# Altium PCB SPI peripherals test.PcbDoc
Units mil, origin at the board's own origin, x right, y up, seen from the top; angles counter-clockwise.
Board outline 6000 x 4000 mil, 2 copper layers (Top Layer, Bottom Layer); 20 components, 24 nets, 92 pads, 18 vias.
Unrouted connection lines stored in the file: 5.
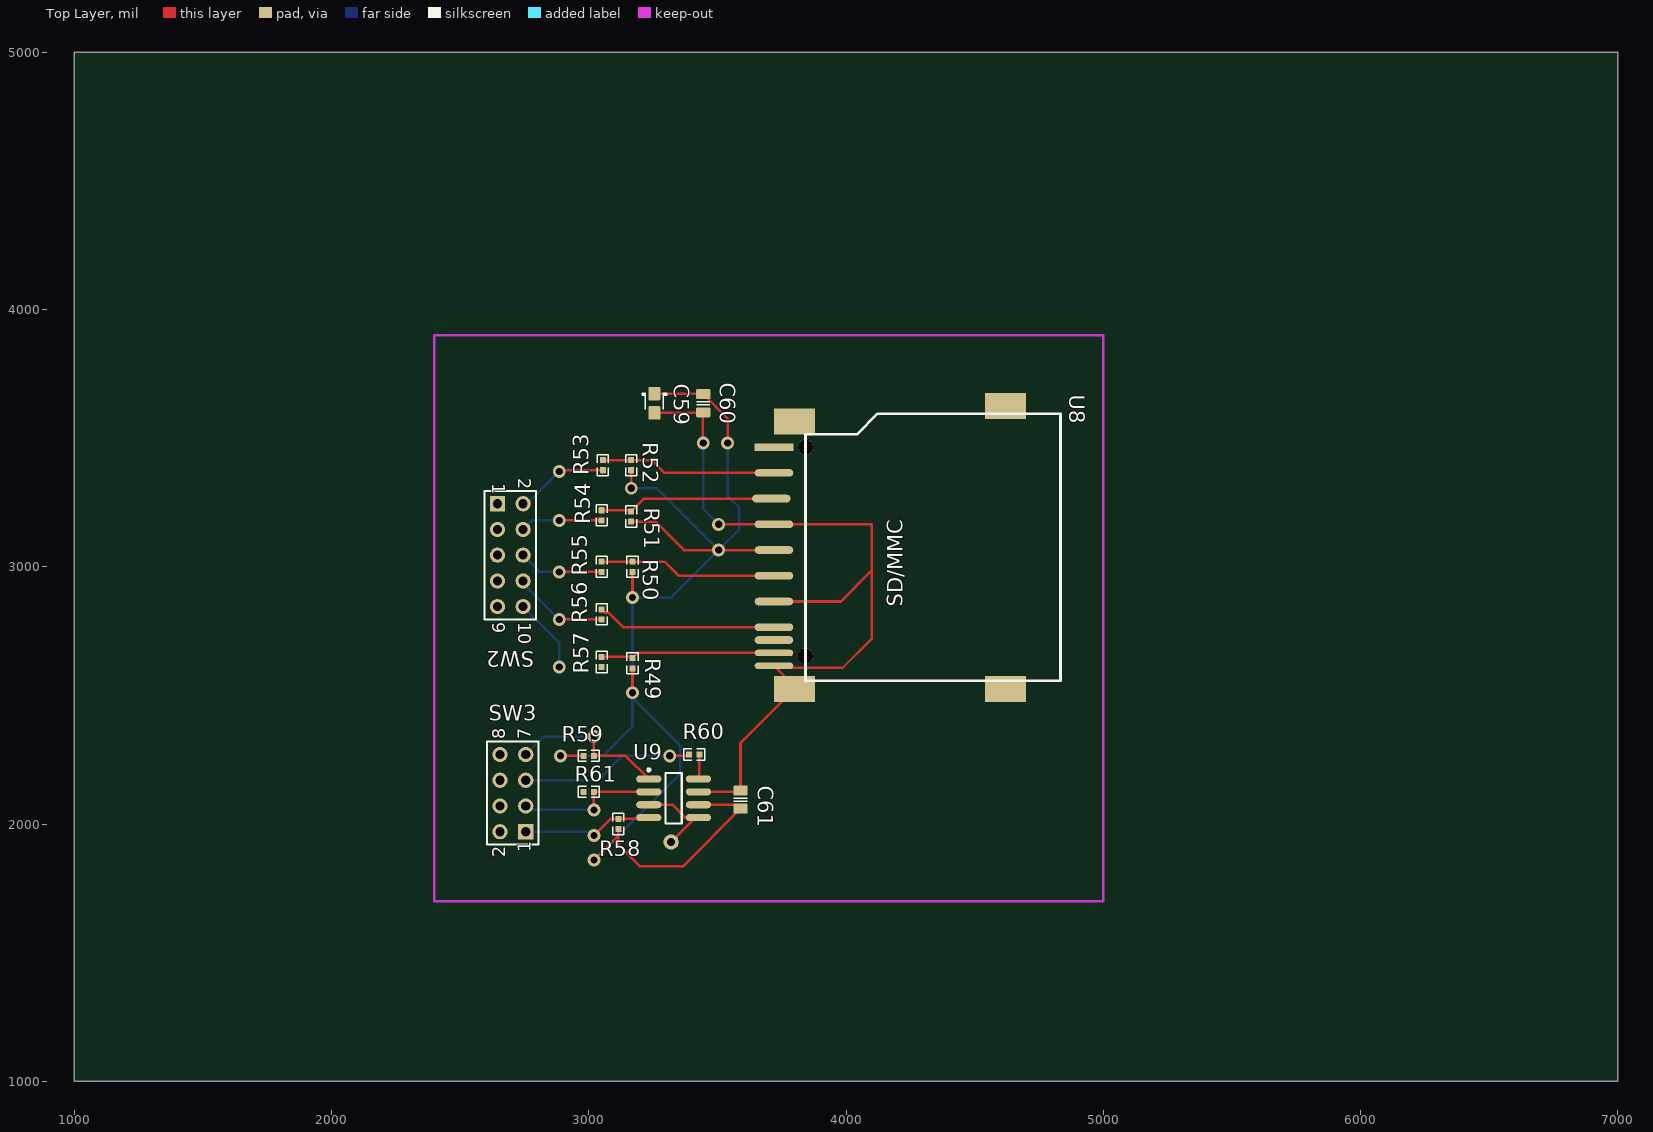
[diagram p0: Top Layer view]
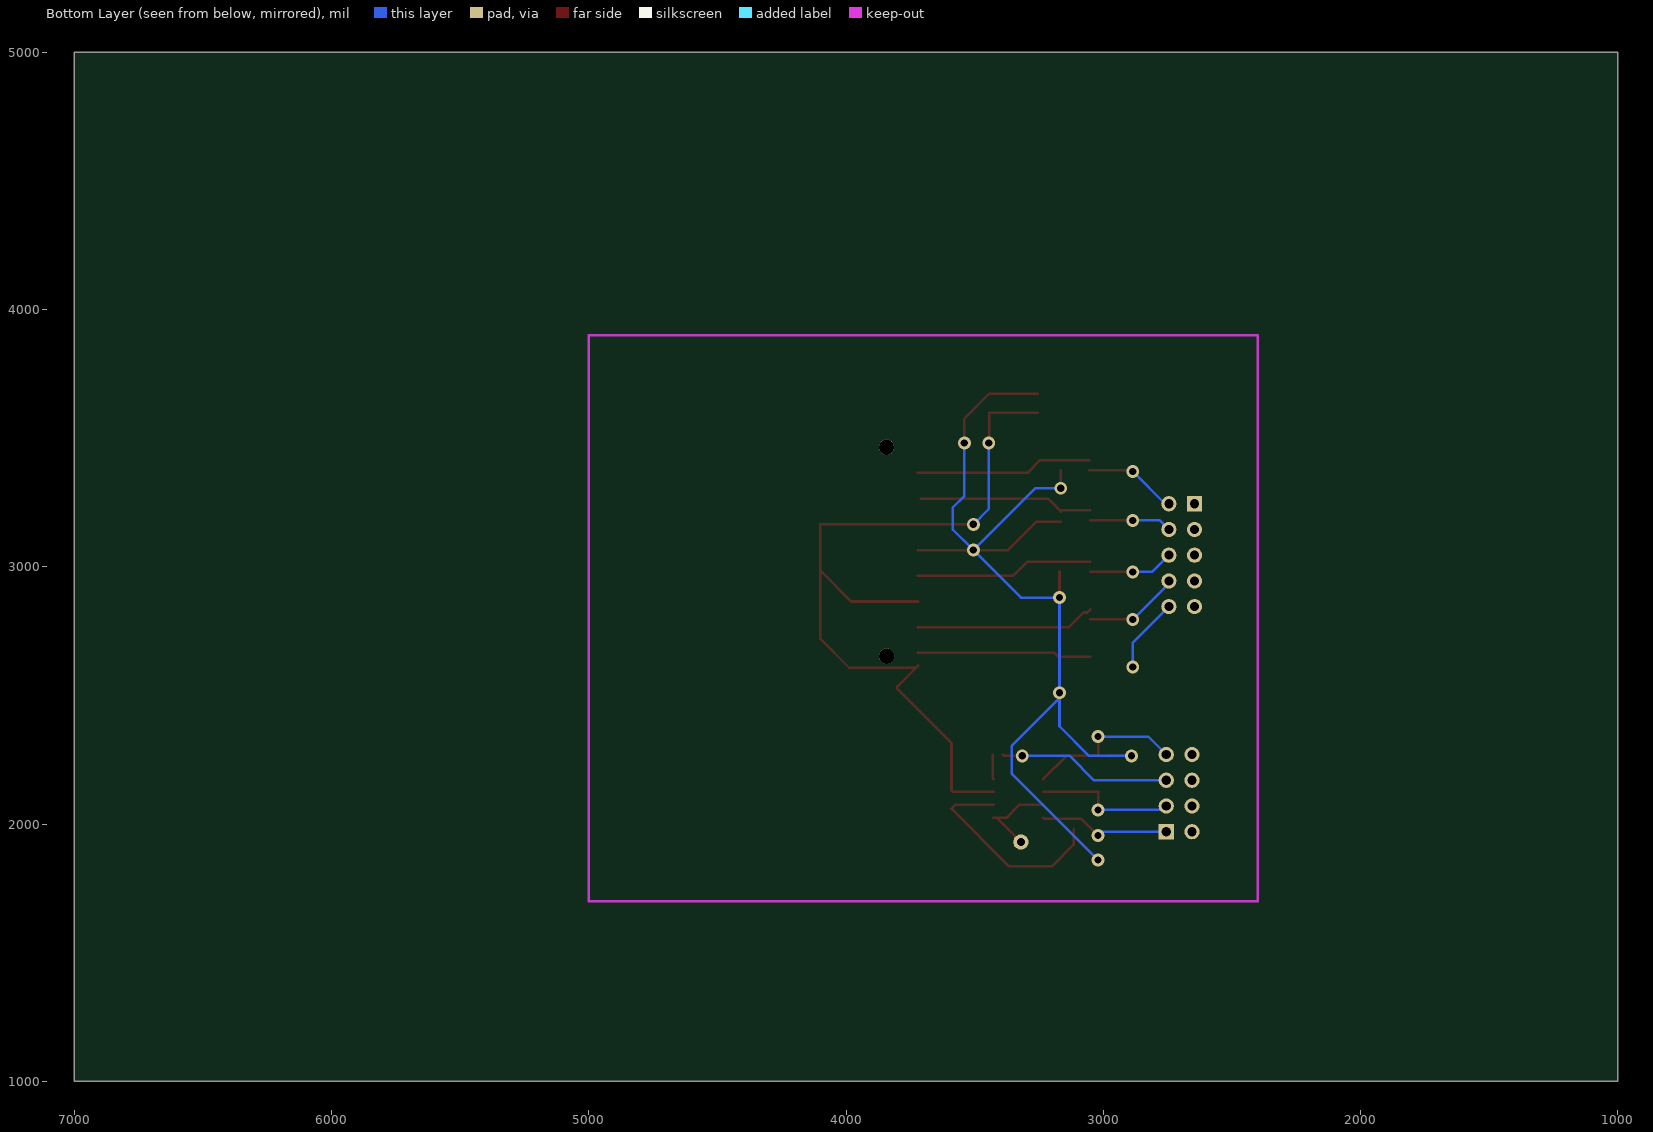
[diagram p1: Bottom Layer view, seen from below]
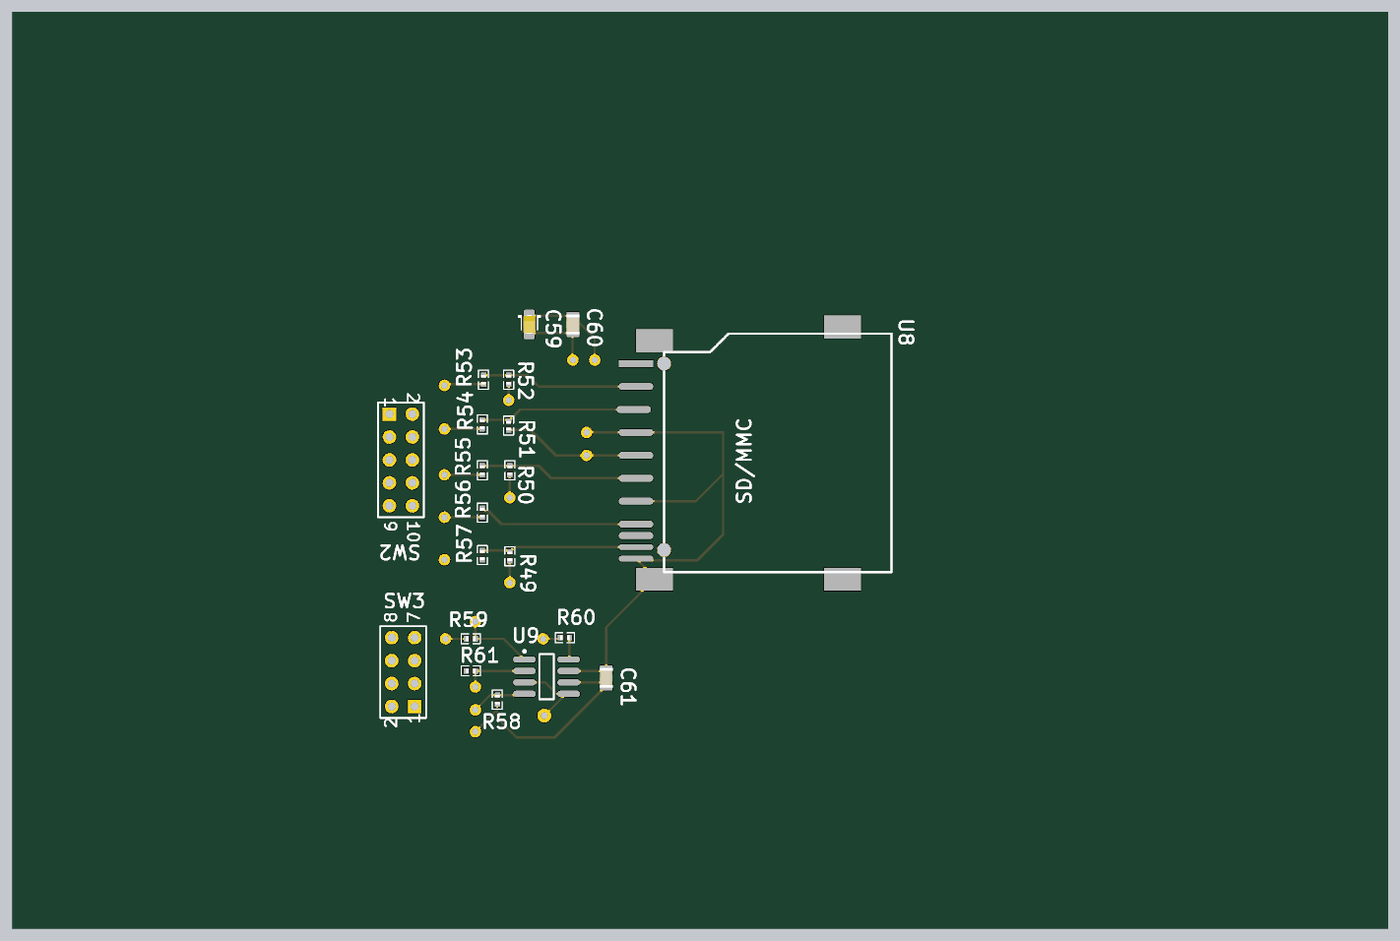
[diagram p2: 3D render of the assembled board from above, using the file's embedded part models]

## Layer stack, top to bottom
Top Layer: signal copper 1.4
Dielectric: dielectric 12.6, FR-4, Dk 4.8
Bottom Layer: signal copper 1.4

## Board outline
1000,1000 7000,1000 7000,5000 1000,5000

## Design rules (kind name [scope] priority, off if disabled: settings)
Clearance [All] p1: gap=10
PolygonConnect [All] p1: connectstyle=Relief reliefconductorwidth=10 reliefentries=4 polygonreliefangle="90 Angle"
RoutingVias [All] p1: holewidth=28 width=50 viastyle="Through Hole" minholewidth=28 minwidth=50 maxholewidth=28 maxwidth=50
SilkscreenOverComponentPads [All] p1: minsilkscreentomaskgap=10
SolderMaskExpansion [All] p1: expansion=4
Width [All] p1: maxlimit=10 minlimit=10 preferedwidth=10
27 further rules are at their usual default settings.

## Components (designator, comment, footprint, x,y, rotation, side; value= is the part's Value field where it differs from the comment)
C59 "Value" CAPMP2012X150USR 3255,3635.75 r270 top
C60 "approved sub OK" CAPC2012N 3445,3635.75 r90 top
C61 "approved sub OK" CAPC2012N 3590,2095 r270 top
R49 "Thick Film" RESC1005N 3170,2625 r270 top
R50 "Thick Film" RESC1005N 3170,3000 r270 top
R51 "Thick Film" RESC1005N 3165,3195 r270 top
R52 "Thick Film" RESC1005N 3165,3395 r270 top
R53 "Thick Film" RESC1005N 3055,3395 r270 top
R54 "Thick Film" RESC1005N 3050,3200 r270 top
R55 "Thick Film" RESC1005N 3050,3000 r270 top
R56 "Thick Film" RESC1005N 3050,2815 r270 top
R57 "Thick Film" RESC1005N 3050,2630 r270 top
R58 "Thick Film" RESC1005N 3115,2000 r90 top
R59 "Thick Film" RESC1005N 3000,2265 r0 top
R60 "Thick Film" RESC1005N 3410,2270 r180 top
R61 "Thick Film" RESC1005N 3000,2125 r180 top
SW2 "Header 5X2" HDR2X5 2645,3245 r270 top
SW3 "Header 4X2" HDR2X4 2755,1970 r90 top
U8 "MMC-SD-SDDMF-0095B-KINGFONT" sd1 3720,3365 r270 top
U9 "AT45DB081D-SU" SOIC-SN8_M 3330,2100 r0 top

## Footprints (in the part's own frame and the unit in brackets; to place one, negate y for a bottom-side part, rotate by r counter-clockwise, add the part's x,y. Pads: shape width x height; smd on the part's side, far side on the other; paste and mask are expansions set on the pad)
CAPC2012N [mm] "Chip Capacitor, Body 2.0x1.2mm, 0805, IPC Medium Density"
  round 0.254 on Mech14: 0(0,0)
  rrect25% 1x1.4 smd: 1(-0.9,0) 2(0.9,0)
  Top Layer pour cut-out: -0.4,0.8 0.4,0.8 0.4,-0.8 -0.4,-0.8
  silkscreen extent -0.15,-0.65 0.15,0.65, body extent -1.1,-0.72 1.1,0.73, height 1.34
CAPMP2012X150USR [mm] "Molded body capacitor, Body 2.0x1.2mm, 0805, IPC Medium Density"
  round 0.254 on Mech14: 0(0,0)
  rrect25% 1.35x1.2 smd: 1(-0.95,0) 2(0.95,0)
  Top Layer pour cut-out: -0.4,0.8 0.4,0.8 0.4,-0.8 -0.4,-0.8
  silkscreen extent -1,-1.2 0.6,1.2, body extent -1.02,-0.67 1.03,0.68, height 1.5
HDR2X4 [mm] "Connector; Header; 4x2 Position"
  rect 1.5x1.5 hole 0.9: 1(0,0)
  round 1.5 hole 0.9: 2(0,2.54) 3(2.54,0) 4(2.54,2.54) 5(5.08,0) 6(5.08,2.54) 7(7.62,0) 8(7.62,2.54)
  silkscreen extent -1.27,-1.27 8.89,3.81
HDR2X5 [mm] "Connector; Header; 5x2 Position"
  rect 1.5x1.5 hole 0.9: 1(0,0)
  round 1.5 hole 0.9: 2(0,2.54) 3(2.54,0) 4(2.54,2.54) 5(5.08,0) 6(5.08,2.54) 7(7.62,0) 8(7.62,2.54) 9(10.16,0) 10(10.16,2.54)
  silkscreen extent -1.27,-1.27 11.43,3.81
RESC1005N [mm] "Chip Resistor, Body 1.0x0.5mm, EIA 0402, IPC Medium Density"
  round 0.2 on Mech14: 0(0,0)
  rrect20% 0.6x0.6 smd: 1(-0.5,0) 2(0.5,0)
  Top Layer pour cut-out: -0.2,0.35 0.2,0.35 0.2,-0.35 -0.2,-0.35
  silkscreen extent -1.05,-0.55 1.05,0.55, body extent -0.52,-0.27 0.53,0.28, height 0.4
sd1 [mil]
  oval 30x150 smd: 1(0,0) 2(100,-10) 3(200,0) 4(300,0) 5(400,0) 6(500,0) 7(600,0) 8(650,0)
  rect 30x150 smd: 9(-100,0)
  oval 25x150 smd: 10(700,0) 11(750,0)
  rect 100x160 smd: 12(-200,80) 13(840,80) 15(-260,900) 16(840,900)
  round 60 hole 60: 21(712.6,122.05) 22(-100,122.44)
  silkscreen extent -230,122 809,1114
SOIC-SN8_M [mm] "SOIC, 8-Leads, Body 4.9x3.8mm, Pitch 1.27mm, IPC Low Density"
  oval 2.5x0.7 smd: 1(-2.45,1.905) 2(-2.45,0.635) 3(-2.45,-0.635) 4(-2.45,-1.905) 5(2.45,-1.905) 6(2.45,-0.635) 7(2.45,0.635) 8(2.45,1.905)
  silkscreen extent -2.57,-2.5 0.8,2.93, body extent -2,-2.5 2,2.5, height 1.75

## Part data
C59: library part CAPT_1u_0805_10V, "Capacitor SMD Tantalum 1uF 20% 10V 0805"
C60 C61: library part CAPC_100n_0805, "Capacitor SMD Cer 100nF 10% 50V X7R 0805"
R49 R50 R51 R52 R53 R54 R55 R56 R57 R58 R59 R60 R61: library part RES_330R_0402_5%, "Resistor SMD chip 330 Ohm 0.063W 5% 0402"
SW2: "Header, 5-Pin, Dual row"
SW3: "Header, 4-Pin, Dual row"

## Free pads (board coordinates)
  round 60 hole 30: 0(3320,1930)

## Via types
v1: diameter 50, hole 28, Top Layer to Bottom Layer, 18 vias

## Nets (pads, with @x,y where several pads share a name; then routed paths per layer and width w, separated by ;. In a path a pad name is that pad's centre, name@x,y a point inside that pad or via, vN(x,y) a via of type N, cw(c..) or ccw(c..) an arc to the next point about the centre after c; other vN are vias at no path point)
+3V3: C59.1 C60.2 C61.2 R49.2 R50.2 R51.2 R52.2 R58.1 R59.1 U8.4 U9.6 | length 5334.2
  Top Layer w10: v1(2890,2265) R59.1 ; v1(3020,1860) 3115,1955 ; R58.1 3115,1955 ; R51.2 3259.68,3175.32 3370,3065 v1(3505,3065) U8.4 ; v1(3165,3305) R52.2 ; v1(3170,2510) R49.2 ; v1(3170,2880) R50.2 ; C59.1 C60.2@3443.03,3673.15 ; U9.6 3574.57,2075 C61.2 3365.43,1835 3200,1835 3115,1920 3115,1955 ; C60.2 3540,3576.18 v1(3540,3480.75)
  Bottom Layer w10: v1(2890,2265) 3055,2265 3170,2380 v1@3170,2490 ; v1(3020,1860) 3355,2195 3355,2305 v1@3170,2490 ; v1(3165,3305) 3265,3305 v1(3505,3065) ; v1(3540,3480.75) 3540,3275 3585,3230 3585,3145 v1(3505,3065) ; v1@3170,2490 v1(3170,2510) v1(3170,2880) 3320,2880 v1(3505,3065)
FLASH_SSEL: SW3.2
GND: C59.2 C60.1 C61.1 R61.2 U8.3 U8.6 U8.11 U8.13 U9.7 | length 3303.5
  Top Layer w10: C59.2 3443.03,3598.35 v1@3443.03,3482.72 ; U9.7 3584.57,2125 C61.1 3590,2315 U8.13 3800,2535 U8.11@3727.6,2607.4 ; v1(3505,3165) U8.3 4100,3165 4100,2995 4100,2985 ; U8.11 U8.11@3727.6,2607.4 ; U8.6 3980,2865 4100,2985 ; U8.11@3727.6,2607.4 3987.4,2607.4 4100,2720 4100,2985
  Bottom Layer w10: v1(3445,3480.75) 3445,3225 v1(3505,3165)
NetR49_1: R49.1 R57.1 U8.10 | length 673.4
  Top Layer w10: R57.1 R49.1@3165,2649.68 ; R49.1 3190.31,2665 U8.10
NetR50_1: R50.1 R55.1 U8.5 | length 692.7
  Top Layer w10: R55.1 R50.1 3295.32,3019.68 3350,2965 U8.5
NetR51_1: R51.1 R54.1 U8.2 | length 675.8
  Top Layer w10: R54.1 R51.1@3160,3219.68 ; R51.1 3215.31,3265 U8.2
NetR52_1: R52.1 R53.1 U8.1 | length 685.6
  Top Layer w10: R53.1 R52.1 3245.32,3414.68 3295,3365 U8.1
NetR53_2: R53.2 SW2.2 | length 379
  Top Layer w10: v1(2885,3370) 2890.32,3375.32 R53.2
  Bottom Layer w10: SW2.2 2760,3245 v1(2885,3370) v1@2870,3370
NetR54_2: R54.2 SW2.4 | length 319.2
  Top Layer w10: v1@2885.32,3180.32 R54.2
  Bottom Layer w10: SW2.4 2780,3180 v1(2885,3180)
NetR55_2: R55.2 SW2.6 | length 331.6
  Top Layer w10: v1@2885.32,2980.32 R55.2
  Bottom Layer w10: SW2.6 2810,2980 v1(2885,2980)
NetR56_1: R56.1 U8.7 | length 698.9
  Top Layer w10: R56.1 3062.56,2822.13 3076.81,2822.13 3133.94,2765 U8.7
NetR56_2: R56.2 SW2.8 | length 372.7
  Top Layer w10: v1@2885.32,2795.32 R56.2
  Bottom Layer w10: SW2.8 2745,2935 v1(2885,2795)
NetR57_2: R57.2 SW2.10 | length 293
  Bottom Layer w10: SW2.10 2885,2705 v1(2885,2610)
NetR58_2: R58.2 SW3.1 U9.4 | length 513.8
  Top Layer w10: v1(3020,1955) 3084.68,2019.68 R58.2 3228.23,2019.68 U9.4
  Bottom Layer w10: SW3.1 3005,1970 v1(3020,1955)
NetR59_2: R59.2 SW3.7 U9.1 | length 619.8
  Top Layer w10: v1@3019.68,2339.68 R59.2 3143.54,2265 U9.1
  Bottom Layer w10: SW3.7 2825,2340 v1(3020,2340)
NetR60_1: R60.1 U9.8 | length 96.3
  Top Layer w10: U9.8 3429.68,2178.23 R60.1
NetR60_2: R60.2 SW3.5 | length 676.7
  Top Layer w10: v1(3315,2265) 3385.32,2265 R60.2
  Bottom Layer w10: SW3.5 3035,2170 3130,2265 v1(3315,2265)
NetR61_1: R61.1 SW3.3 U9.2 | length 554.8
  Top Layer w10: v1@3019.68,2055.32 R61.1 U9.2
  Bottom Layer w10: SW3.3 2770,2055 v1(3020,2055)
RESET_N: pad.0 U9.3 U9.5 | length 348
  Top Layer w10: U9.3 3325,2075 3375,2025 U9.5@3415,2025 ; pad.0 U9.5@3415,2025 ; U9.5 U9.5@3415,2025
SD_DETECT: SW2.9
SPI_MISO: SW2.7 SW3.6
SPI_MOSI: SW2.3 SW3.8
SPI_SCK: SW2.5 SW3.4
SPI_SSEL: SW2.1
pads on no net: C59.0 C60.0 C61.0 R49.0 R50.0 R51.0 R52.0 R53.0 R54.0 R55.0 R56.0 R57.0 R58.0 R59.0 R60.0 R61.0 U8.8 U8.9 U8.12 U8.15 U8.16 U8.21 U8.22

## Keep-outs
Keep-Out Layer:
  lines w10: 2400,1700 2400,3900 5000,3900 5000,1700 2400,1700

## Text inside footprints (layer, text, board x,y; h text height)
SW2: Top Overlay "2" at 2725,3345 h50 r270; Top Overlay "1" at 2625,3325 h50 r270; Top Overlay "9" at 2625,2785 h50 r270; Top Overlay "10" at 2725,2785 h50 r270
SW3: Top Overlay "8" at 2675,2330 h50 r90; Top Overlay "7" at 2775,2330 h50 r90; Top Overlay "1" at 2775,1890 h50 r90; Top Overlay "2" at 2675,1870 h50 r90
U8: Top Overlay "SD/MMC" at 4220,2845 h60 r90